# Altium PCB RoverBreakout2.PcbDoc
Units mm, origin at the board's own origin, x right, y up, seen from the top; angles counter-clockwise.
Board outline 78.49 x 33.66 mm, 2 copper layers (Top Layer, Bottom Layer); 29 components, 22 nets, 159 pads, 31 vias.
Unrouted connection lines stored in the file: 1.
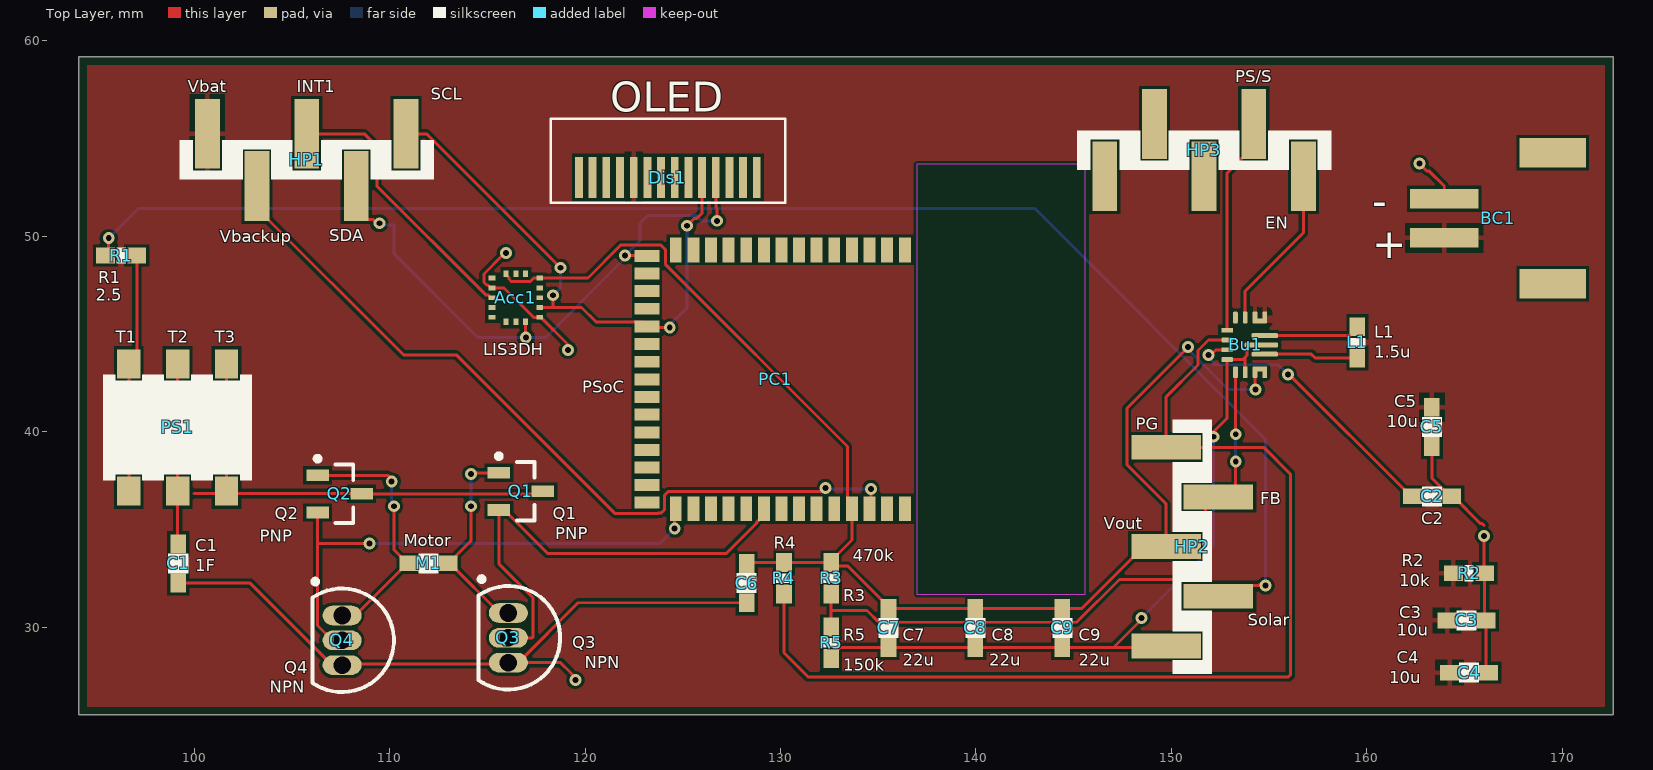
[diagram p0: Top Layer view]
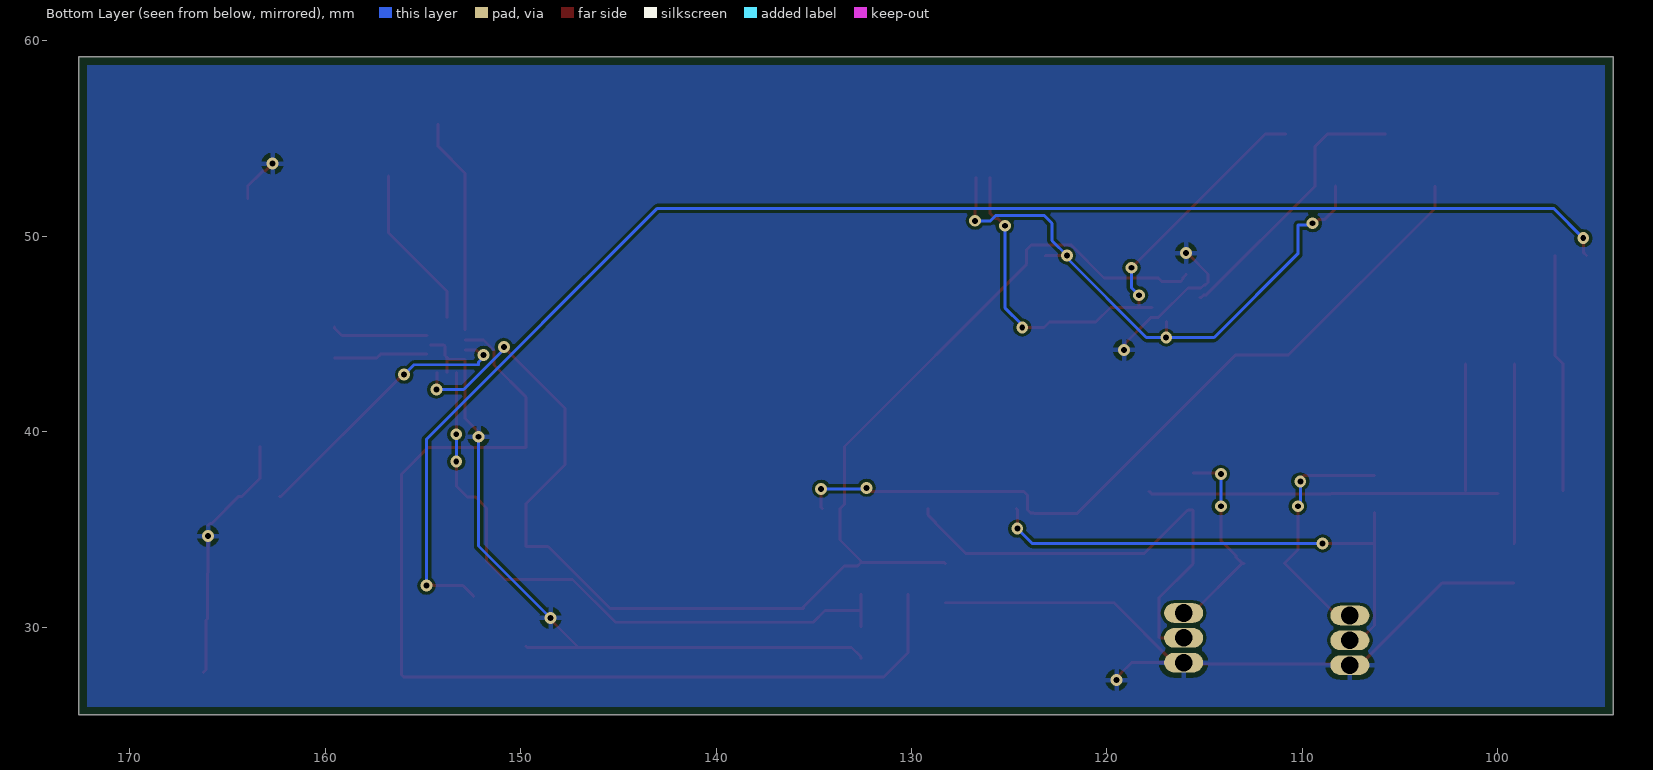
[diagram p1: Bottom Layer view, seen from below]

## Layer stack, top to bottom
Top Solder: solder mask 0.0102, Solder Resist, Dk 3.5
Top Layer: signal copper 0.0356
Dielectric 1: dielectric 0.32, FR-4, Dk 4.8
Bottom Layer: signal copper 0.0356
Bottom Solder: solder mask 0.0102, Solder Resist, Dk 3.5

## Board outline
94.107,25.527 94.107,59.182 172.593,59.182 172.593,25.527

## Design rules (kind name [scope] priority, off if disabled: settings)
BoardOutlineClearance [All] p1: gap=0.406 ignorepadtopadclearanceinfootprint=FALSE except(0: Arc-SplitContinuation Track-SplitContinuation SMDPad-SplitContinuation THPad-SplitContinuation Via-SplitContinuation Fill-SplitContinuation Poly-SplitContinuation Region-SplitContinuation Text-SplitContinuation)
Clearance [All] p1: gap=0.152 ignorepadtopadclearanceinfootprint=FALSE
HoleSize [All] p1: absolutevalues=TRUE maxlimit=6.223 minlimit=0.305 maxpercent=80.000 minpercent=20.000
MinimumSolderMaskSliver [All] p1 off: minsoldermaskwidth=0.254
NetAntennae [All] p1 off: netantennaetolerance=0
PolygonConnect [All] p1: connectstyle=Relief reliefconductorwidth=0.254 reliefentries=4 polygonreliefangle="90 Angle" airgapwidth=0.254
RoutingVias [All] p1: holewidth=0.305 width=0.61 viastyle="Through Hole" minholewidth=0.152 minwidth=0.305 maxholewidth=0.6 maxwidth=1.2
SilkToSilkClearance [All] p1 off: silktosilkclearance=0.254
SilkToSolderMaskClearance [IsPad] p1 off: minsilkscreentomaskgap=0.254 clearancetoexposedcopper=TRUE
SolderMaskExpansion [All] p1: expansion=0.102 istentingtop=FALSE
Width [All] p1: maxlimit=2 minlimit=0.152 preferedwidth=0.152 minimp=50.000000 maximp=50.000000 favimp=50.000000
25 further rules are at their usual default settings.

## Components (designator, comment, footprint, x,y, rotation, side; value= is the part's Value field where it differs from the comment)
Acc1 "LIS3DH" LIS3DH 116.459,46.863 r0 top
BC1 "BatteryConnector" BatteryConnector 163.957,50.927 r90 top
Bu1 "Buck_Boost_Converter" Buck_Boost_Converter 153.924,44.45 r0 top
C1 "Capacitor1" PASSIVE-CAPACITOR-0603 99.187,33.274 r90 top value=1F
C2 "Capacitor1" PASSIVE-CAPACITOR-0603 163.338,36.703 r180 top value=?
C3 "Capacitor1" PASSIVE-CAPACITOR-0603 165.1,30.353 r180 top value=10uF
C4 "Capacitor1" PASSIVE-CAPACITOR-0603 165.227,27.686 r180 top value=10uF
C5 "Capacitor1" PASSIVE-CAPACITOR-0603 163.322,40.259 r90 top value=10uF
C6 "Capacitor1" PASSIVE-CAPACITOR-0603 128.27,32.258 r90 top value=10uF
C7 "Capacitor1" PASSIVE-CAPACITOR-0603 135.525,29.972 r90 top value=22uF
C8 "Capacitor1" PASSIVE-CAPACITOR-0603 139.97,29.972 r90 top value=22uF
C9 "Capacitor1" PASSIVE-CAPACITOR-0603 144.415,29.972 r90 top value=22uF
Dis1 "Display" Display 124.206,53.467 r0 top
HP1 "Header-Pin" Header_Pin 105.791,53.975 r0 top
HP2 "Header-Pin" Header_Pin 151.003,34.163 r90 top
HP3 "Header-Pin" Header_Pin 151.638,54.356 r180 top
L1 "Inductor" PASSIVE-INDUCTOR-0603 159.512,44.577 r270 top value=1.5uH
M1 "Motor" Motor 1373.998,-219.526 r0 top
PC1 "PSoC 63 BLE" "PSoC-63 BLE" 141.288,35.688 r270 top
PS1 "Switch" "3-Way Switch" 98.679,41.656 r0 top
Q1 "PNP" SOT-23B_N 116.713,36.957 r0 top
Q2 "PNP" SOT-23B_N 107.442,36.83 r0 top
Q3 "NPN" TO-226-AA 116.078,29.464 r180 top
Q4 "NPN" TO-226-AA 107.569,29.337 r180 top
R1 "Resistor" PASSIVE-RESISTOR-0603 96.266,49.022 r0 top value=2.5
R2 "Resistor" PASSIVE-RESISTOR-0603 165.227,32.766 r0 top value=10k
R3 "Resistor" PASSIVE-RESISTOR-0603 132.588,32.512 r270 top value=470K
R4 "Resistor" PASSIVE-RESISTOR-0603 130.175,32.512 r270 top value=100k
R5 "Resistor" PASSIVE-RESISTOR-0603 132.588,29.21 r270 top value=150K

## Footprints (in the part's own frame and the unit in brackets; to place one, negate y for a bottom-side part, rotate by r counter-clockwise, add the part's x,y. Pads: shape width x height; smd on the part's side, far side on the other; paste and mask are expansions set on the pad)
"3-Way Switch" [mm]
  rect 1.2x1.5 smd: 1(-2.022,-4.679) 1(-2.022,1.821) 2(0.478,-4.679) 2(0.478,1.821) 3(2.978,-4.679) 3(2.978,1.821)
  silkscreen extent -3.32,-4.13 4.28,1.27, body extent -3.4,-5.23 4.3,2.27, height 3.3
BatteryConnector [mm]
  rect 1x3.5 smd: GND(1,0) VBAT(-1,0)
  rect 1.5x3.4 smd: ""(-3.35,-5.55) ""(3.35,-5.55)
  body extent -3.95,-6 3.95,0, height 5.5
Buck_Boost_Converter [mm] "Buck Boost Converter"
  rrect50% 0.25x0.6 smd: EN(-0.15,1.4) FB(-0.65,-1.4) FB2(-0.15,-1.4) VIN(0.35,1.4) VIN(0.85,1.4) VOUT(0.35,-1.4) VOUT(0.85,-1.4) VSEL(-0.65,1.4)
  rrect50% 0.6x0.25 smd: GND(-1.075,-0.75) PG(-1.075,0.25) VAUX(-1.075,-0.25)
  rrect50% 1.35x0.25 smd: L1(0.85,0.475) L2(0.85,-0.475)
  rrect50% 1.7x0.25 smd: PGND(0.675,0)
  rect 0.6x0.25 smd: PS/S(-1.075,0.75)
  rrect50% 0.75x0.25 smd: VIN(0.6,1.225) VOUT(0.6,-1.225)
  body extent -1.07,-1.43 1.28,1.4, height 0.4
Display [mm]
  rect 0.4x2.1 smd: 1(-4.519,-0.443) 2(-3.819,-0.443) 3(-3.119,-0.443) 4(-2.419,-0.443) 5(-1.719,-0.443) 6(-1.019,-0.443) 7(-0.319,-0.443) 8(0.381,-0.443) 9(1.081,-0.443) 10(1.781,-0.443) 11(2.481,-0.443) 12(3.181,-0.443) 13(3.881,-0.443) 14(4.581,-0.443)
  silkscreen extent -5.97,-1.74 6.03,2.56
Header_Pin [mm]
  rect 1.27x3.56 smd: 1(-5.113,1.274) 2(-2.573,-1.396) 3(-0.033,1.274) 4(2.507,-1.396) 5(5.047,1.274)
  silkscreen extent -6.53,-1.06 6.47,0.94, body extent -6.1,-2.62 6.19,2.26, height 9.78
LIS3DH [mm]
  rect 0.25x0.35 smd: ADC1(0.5,1.225) ADC2(0,1.225) CS(-0.5,-1.225) SDA/SDI/SDO(0.5,-1.225) "SDO / SA0"(0,-1.225) VDD(-0.5,1.225)
  rect 0.35x0.25 smd: ADC3(-1.225,1) GND(-1.225,0.5) GND(1.225,-1) INT1(-1.225,0) INT2(-1.225,-1) NC(1.225,0) NC(1.225,0.5) RES(-1.225,-0.5) "SCL / SPC"(1.225,-0.5) VDDIO(1.225,1)
  body extent -1.5,-1.5 1.5,1.5, height 1
Motor [mm]
  rect 0.965x0.8 smd: 1(-1263,252.8) 2(-1261,252.8)
  silkscreen extent -1262.5,252.3 -1261.5,253.3
PASSIVE-CAPACITOR-0603 [mm]
  rect 0.965x0.8 smd: 1(-1,0) 2(1,0)
  silkscreen extent -0.5,-0.5 0.5,0.5
PASSIVE-INDUCTOR-0603 [mm] "Inductor"
  rect 0.965x0.8 smd: 1(-0.8,0) 2(0.8,0)
  silkscreen extent -0.23,-0.4 0.23,0.4, body extent -0.82,-0.4 0.8,0.4, height 0.4
PASSIVE-RESISTOR-0603 [mm]
  rect 0.965x0.8 smd: 1(-0.8,0) 2(0.8,0)
  silkscreen extent -0.23,-0.4 0.23,0.4, body extent -0.82,-0.4 0.8,0.4, height 0.4
"PSoC-63 BLE" [mm]
  rect 1.27x0.61 smd: 1(-0.38,-4.93) 2(-0.38,-5.83) 3(-0.38,-6.73) 4(-0.38,-7.63) 5(-0.38,-8.54) 6(-0.38,-9.44) 7(-0.38,-10.34) 8(-0.38,-11.24) 9(-0.38,-12.14) 10(-0.38,-13.04) 11(-0.38,-13.95) 12(-0.38,-14.85) 13(-0.38,-15.75) 14(-0.38,-16.65) 30(-13.62,-16.65) 31(-13.62,-15.75) 32(-13.62,-14.85) 33(-13.62,-13.95) 34(-13.62,-13.04) 35(-13.62,-12.14) 36(-13.62,-11.24) 37(-13.62,-10.34) 38(-13.62,-9.44) 39(-13.62,-8.54) 40(-13.62,-7.63) 41(-13.62,-6.73) 42(-13.62,-5.83) 43(-13.62,-4.93)
  rect 0.61x1.27 smd: 15(-0.69,-18.12) 16(-1.59,-18.12) 17(-2.49,-18.12) 18(-3.39,-18.12) 19(-4.29,-18.12) 20(-5.2,-18.12) 21(-6.1,-18.12) 22(-7,-18.12) 23(-7.9,-18.12) 24(-8.8,-18.12) 25(-9.7,-18.12) 26(-10.61,-18.12) 27(-11.51,-18.12) 28(-12.41,-18.12) 29(-13.31,-18.12)
  Top Layer keep-out region: -18,-4.31 4,-4.31 4,4.31 -18,4.31
  body extent -14,-18.5 0,0, height 1.2
SOT-23B_N [mm] "SOT23, 3-Leads, Body 2.9x1.3mm, Pitch 0.95mm, Lead Span 2.4mm, IPC Medium Density"
  rect 1.15x0.6 smd: 1(-1.125,0.95) 2(-1.125,-0.95) 3(1.125,0)
  silkscreen extent -1.25,-1.5 0.7,1.92, body extent -0.7,-1.5 0.7,1.5, height 1.14
TO-226-AA [mm] "TO, Flat Index; 3 In-Line, Axial Leads; Body Dia. 4.8mm; Leads 0.55 x 0.51 mm (max)"
  oval 2x1 hole 0.9: 1(0,-1.27) 2(0,0) 3(0,1.27)
  silkscreen extent -2.65,-3.13 1.52,2.65, body extent -2.65,-2.66 1.52,2.66, height 5.33

## Part data
Q1 Q2: "PNP Bipolar Transistor", LatestRevisionDate=29-May-2009, LatestRevisionNote="IPC-7351 Footprint Added.", PackageDescription="3-Pin SOT-23 Package 0.95 mm Pitch, 2.4 mm Lead Span", PackageReference=SOT-23B, PackageVersion=Aug-1999, Published=8-Jun-2000, Publisher="Altium Limited"
Q3 Q4: "NPN Bipolar Transistor", Code_JEDEC=TO-226-AA, LatestRevisionDate=17-Jul-2002, LatestRevisionNote="Re-released for DXP Platform.", PackageDescription="TO, Flat Index; 3 In-Line, Axial Leads; Body Dia. 4.8mm; Leads 0.55 x 0.51 mm (max)", PackageReference=TO-226-AA, Published=8-Jun-2000, Publisher="Altium Limited"
R1 R2 R3 R4 R5: library part Resistor1

## Via types
v1: diameter 0.61, hole 0.305, Top Layer to Bottom Layer, 31 vias

## Nets (pads, with @x,y where several pads share a name; then routed paths per layer and width w, separated by ;. In a path a pad name is that pad's centre, name@x,y a point inside that pad or via, vN(x,y) a via of type N, cw(c..) or ccw(c..) an arc to the next point about the centre after c; other vN are vias at no path point)
EN: Bu1.EN HP3.1 | length 8.5
  Top Layer w0.152: Bu1.EN 153.774,47.213 156.751,50.19 HP3.1
FB: Bu1.FB HP2.4 R3.2 R5.1 | length 33
  Top Layer w0.152: R5.1 132.588,30.861 ; R3.2 132.588,30.861 ; Bu1.FB 153.274,39.893 v1(153.289,39.878) ; v1(153.289,38.481) 153.289,37.229 152.73,36.67 HP2.4 152.297,36.67 151.738,36.111 151.738,33.4 150.791,32.453 147.339,32.453 145.146,30.261 135.03,30.261 134.43,30.861 132.588,30.861
  Bottom Layer w0.152: v1(153.289,38.481) v1(153.289,39.878)
GND: Acc1.GND BC1.GND Bu1.FB2 Bu1.GND Bu1.PGND C1.1 C2.1 C3.1 C4.1 C5.1 C6.1 C7.1 C8.1 C9.1 HP2.1 Q3.3 Q4.3 R2.2 R5.2 | length 96
  Top Layer w0.152: C1.1 99.203,32.258 102.87,32.258 107.061,28.067 Q4.3 107.632,28.13 116.014,28.13 Q3.3 Q3.3@116.578,28.194 ; v1(115.951,49.149) 115.951,49.111 115.862,49.022 115.77,49.022 114.83,48.083 114.83,47.643 114.964,47.509 115.038,47.509 115.184,47.363 115.234,47.363 115.857,47.363 117.357,45.863 117.684,45.863 117.734,45.863 119.126,44.471 v1(119.126,44.196) ; v1(119.507,27.305) 119.507,27.429 119.253,27.683 119.253,27.686 118.745,28.194 Q3.3@116.578,28.194 ; C6.1 119.642,31.258 Q3.3@116.578,28.194 ; R5.2 132.588,28.492 133.068,28.972 C7.1 C8.1 C9.1 147.033,28.972 ; v1(148.463,30.48) 148.463,30.402 147.033,28.972 ; HP2.1 149.651,28.972 147.033,28.972 ; v1(152.146,39.751) 152.082,39.815 152.082,39.941 152.849,40.708 Bu1.GND 153.662,43.7 153.774,43.812 ; Bu1.FB2 153.774,43.812 ; Bu1.PGND 153.919,44.45 153.87,44.401 153.87,43.908 153.774,43.812 ; v1(162.687,53.721) 163.068,53.34 163.195,53.34 163.957,52.578 BC1.GND ; C5.1 163.322,37.637 164.256,36.703 C2.1 164.42,36.703 165.817,35.306 165.9,35.306 165.989,35.217 ; v1(165.989,34.671) 165.989,32.804 R2.2 166.027,30.426 C3.1 166.1,27.813 C4.1
  Bottom Layer w0.152: v1(148.463,30.48) 152.146,34.163 v1(152.146,39.751)
INT1: Acc1.INT1 HP1.3 | length 14.1
  Top Layer w0.152: HP1.3 108.708,55.249 109.347,54.61 109.347,52.578 114.916,47.009 115.038,47.009 115.184,46.863 Acc1.INT1
NetBu1_L1: Bu1.L1 L1.1 | length 5
  Top Layer w0.152: Bu1.L1 159.142,44.925 159.512,45.295 L1.1
NetBu1_L2: Bu1.L2 L1.2 | length 4.8
  Top Layer w0.152: Bu1.L2 157.157,43.975 157.355,43.777 L1.2
NetBu1_VAUX: Bu1.VAUX C2.2 | length 14.7
  Top Layer w0.152: v1(151.892,43.942) 152.016,43.942 152.274,44.2 Bu1.VAUX ; v1(155.956,42.926) 156.032,42.926 162.255,36.703 C2.2
  Bottom Layer w0.152: v1(151.892,43.942) 151.892,43.818 152.146,43.564 152.146,43.434 155.448,43.434 v1(155.956,42.926)
NetC1_2: C1.2 PS1.2 | length 9.2
  Top Layer w0.152: PS1.2@99.157,43.477 99.157,36.977 99.157,34.304 C1.2
NetM1_1: M1.1 Q2.1 Q4.1 | length 13
  Top Layer w0.152: Q2.1 109.921,37.78 110.109,37.592 v1(110.109,37.465) ; Q4.1 108.249,30.607 110.916,33.274 110.236,33.954 v1(110.236,36.195)
  Bottom Layer w0.152: v1(110.109,37.465) 110.109,36.284 110.198,36.195 v1(110.236,36.195)
NetM1_2: M1.2 Q1.1 Q3.1 | length 10.6
  Top Layer w0.152: M1.2 M1.2@113.081,33.274 ; v1(114.173,36.195) 114.173,34.449 113.404,33.68 113.404,33.598 M1.2@113.081,33.274 ; v1(114.173,37.846) 114.237,37.91 114.363,37.91 114.366,37.907 Q1.1 ; Q3.1 115.621,30.734 M1.2@113.081,33.274
  Bottom Layer w0.152: v1(114.173,36.195) v1(114.173,37.846)
NetPS1_1: PS1.1 R1.2 | length 12.2
  Top Layer w0.152: PS1.1@96.657,36.977 96.657,43.477 97.066,43.886 R1.2
NetPS1_3: PS1.3 Q1.3 Q2.3 | length 24.4
  Top Layer w0.152: 100.006,36.85 108.547,36.85 Q2.3 117.711,36.83 Q1.3 ; PS1.3@101.657,36.977 PS1.3@101.657,43.477
PG: Bu1.PG HP2.5 R4.2 | length 54
  Top Layer w0.152: R4.2 130.175,28.702 131.407,27.47 155.994,27.47 156.083,27.559 156.083,37.846 154.719,39.21 HP2.5 149.729,41.792 151.359,43.421 151.359,44.163 151.896,44.7 Bu1.PG
PS/S: Bu1.PS/S HP3.2 | length 11.1
  Top Layer w0.152: Bu1.PS/S 152.849,53.245 154.211,54.607 HP3.2
SCL: "Acc1.SCL / SPC" Dis1.10 HP1.5 PC1.25 | length 28.7
  Top Layer w0.152: HP1.5 111.893,55.249 v1(118.745,48.396) 118.745,48.514 v1@118.839,48.608 ; 117.684,46.363 118.364,46.363 ; v1(118.364,46.99) 118.364,46.363 ; v1(124.333,45.339) 123.217,45.339 PC1.25 122.939,45.617 120.569,45.617 119.823,46.363 118.364,46.363 ; v1(125.222,50.546) 125.603,50.927 125.73,50.927 125.987,51.184 Dis1.10
  Bottom Layer w0.152: v1(118.364,46.99) 118.745,47.371 v1(118.745,48.396) ; v1(124.333,45.339) 124.333,45.466 125.222,46.355 v1(125.222,50.546)
SDA: Acc1.SDA/SDI/SDO Dis1.11 HP1.4 PC1.29 | length 30.6
  Top Layer w0.152: HP1.4 108.298,51.434 108.857,50.875 109.148,50.875 109.35,50.673 v1(109.474,50.673) ; Acc1.SDA/SDI/SDO 116.959,45.093 116.967,45.085 v1(116.967,44.831) ; v1(122.047,49.022) 123.144,49.022 PC1.29 ; Dis1.11 126.687,51.494 126.746,51.435 v1(126.746,50.8)
  Bottom Layer w0.152: v1(109.474,50.673) 109.561,50.586 110.236,50.586 ; 110.236,50.546 110.236,49.111 114.516,44.831 v1(116.967,44.831) 117.983,44.831 122.047,48.895 v1(122.047,49.022) 122.809,49.784 122.809,50.673 123.215,51.079 125.672,51.079 125.951,50.8 v1(126.746,50.8)
Vb1: PC1.14 Q2.2 Q4.2 | length 27
  Top Layer w0.152: Q2.2 106.317,34.29 ; Q4.2 107.069,29.337 106.317,30.089 106.317,34.29 ; v1(108.966,34.29) 106.317,34.29 ; v1(124.587,35.052) 124.587,36.017 PC1.14
  Bottom Layer w0.152: v1(108.966,34.29) 123.825,34.29 v1(124.587,35.052)
Vb2: PC1.9 Q1.2 Q3.2 | length 24.2
  Top Layer w0.152: Q3.2 117.297,29.464 117.348,29.515 117.348,31.496 115.588,33.256 Q1.2 115.863,36.007 118.088,33.782 127.225,33.782 128.782,35.338 128.782,35.372 129.148,35.738 PC1.9
Vbackup: HP1.2 PC1.3 | length 41.1
  Top Layer w0.152: HP1.2 103.218,51.434 110.71,43.942 113.411,43.942 121.539,35.814 123.698,35.814 123.728,35.844 123.898,35.844 124.068,36.015 124.068,36.761 124.264,36.957 132.08,36.957 132.26,37.137 v1(132.298,37.137) ; PC1.3 134.62,36.13 v1(134.62,37.084)
  Bottom Layer w0.152: v1(132.298,37.137) 132.351,37.084 v1(134.62,37.084)
VBat: BC1.VBAT Bu1.VIN C3.2 C4.2 C5.2 Dis1.5 HP1.1 R2.1
Vout1: Acc1.VDD Acc1.VDDIO Bu1.VOUT C6.2 C7.2 C8.2 C9.2 HP2.3 PC1.4 R3.1 R4.1 | length 71.1
  Top Layer w0.152: Acc1.VDD 115.959,48.038 116.105,47.892 116.105,47.818 116.239,47.684 117.179,47.684 117.357,47.863 Acc1.VDDIO 120.146,47.863 ; 120.146,47.875 121.826,49.555 123.874,49.555 124.104,49.325 124.104,48.578 133.429,39.254 133.429,36.297 PC1.4 133.658,34.465 132.588,33.395 R3.1 ; C6.2 128.324,33.312 R4.1 R3.1 ; v1(150.854,44.337) 147.721,41.203 147.721,38.318 149.729,36.31 HP2.3 148.584,34.13 145.426,30.972 C9.2 C8.2 C7.2 135.525,31.054 133.432,33.147 132.753,33.147 R3.1 ; Bu1.VOUT@154.274,43.05 154.274,42.195 v1(154.305,42.164)
  Bottom Layer w0.152: v1(150.854,44.337) 150.854,44.221 151.13,43.945 151.13,43.942 152.908,42.164 v1(154.305,42.164)
VSolar: HP2.2 R1.1 | length 75.8
  Top Layer w0.152: R1.1 95.631,49.187 v1(95.631,49.911) ; HP2.2 152.958,32.149 154.45,32.149 154.496,32.195 154.749,32.195 v1(154.813,32.131)
  Bottom Layer w0.152: v1(95.631,49.911) 97.155,51.435 143.002,51.435 154.813,39.624 v1(154.813,32.131)
pads on no net: "Acc1.SDO / SA0" Acc1.ADC1 Acc1.ADC2 Acc1.ADC3 Acc1.CS Acc1.INT2 Acc1.NC Acc1.RES BC1. Bu1.VSEL Dis1.1 Dis1.2 Dis1.3 Dis1.4 Dis1.6 Dis1.7 Dis1.8 Dis1.9 Dis1.12 Dis1.13 Dis1.14 HP3.3 HP3.4 HP3.5 PC1.1 PC1.2 PC1.5 PC1.6 PC1.7 PC1.8 PC1.10 PC1.11 PC1.12 PC1.13 PC1.15 PC1.16 PC1.17 PC1.18 PC1.19 PC1.20 PC1.21 PC1.22 PC1.23 PC1.24 PC1.26 PC1.27 PC1.28 PC1.30 PC1.31 PC1.32 PC1.33 PC1.34 PC1.35 PC1.36 PC1.37 PC1.38 PC1.39 PC1.40 PC1.41 PC1.42 PC1.43

## Polygon pours and split planes (outlines as drawn)
VBat on Top Layer "VBAT_L01_P001" (solid, pour order 1): 94.488,59.182 172.212,59.182 172.212,25.527 94.488,25.527
GND on Bottom Layer "GND_L02_P002" (solid, pour order 2): 94.488,59.182 172.212,59.182 172.212,25.527 94.488,25.527

## Silkscreen, mask and mechanical layers (free items; w line width, h text height)
Top Overlay:
  text "PS/S" at 153.264,57.887 h0.61
  text "Vbat" at 99.67,57.379 h0.61
  text "INT1" at 105.258,57.379 h0.61
  text "SCL" at 112.116,56.998 h0.61
  text "OLED" at 121.285,56.388 h1.52
  text "-" at 160.274,51.054 h1.52
  text "EN" at 154.788,50.394 h0.61
  text "SDA" at 106.909,49.759 h0.61
  text "Vbackup" at 101.321,49.708 h0.61
  text "+" at 160.274,48.895 h1.52
  text "R1" at 95.098,47.6 h0.61
  text "2.5" at 94.971,46.711 h0.61
  text "L1" at 160.376,44.806 h0.61
  text "T1" at 95.987,44.552 h0.61
  text "T2" at 98.654,44.552 h0.61
  text "T3" at 101.067,44.552 h0.61
  text "LIS3DH" at 114.783,43.917 h0.61
  text "1.5u" at 160.376,43.79 h0.61
  text "PSoC" at 119.863,42.012 h0.61
  text "C5" at 161.392,41.25 h0.61
  text "10u" at 161.011,40.234 h0.61
  text "PG" at 148.184,40.107 h0.61
  text "FB" at 154.534,36.297 h0.61
  text "Q2" at 104.115,35.535 h0.61
  text "Q1" at 118.339,35.535 h0.61
  text "C2" at 162.789,35.281 h0.61
  text "Vout" at 146.533,35.027 h0.61
  text "PNP" at 118.466,34.519 h0.61
  text "PNP" at 103.353,34.392 h0.61
  text "Motor" at 110.719,34.138 h0.61
  text "R4" at 129.642,34.011 h0.61
  text "C1" at 100.051,33.884 h0.61
  text "470k" at 133.706,33.376 h0.61
  text "R2" at 161.773,33.122 h0.61
  text "1F" at 100.051,32.868 h0.61
  text "10k" at 161.646,32.106 h0.61
  text "R3" at 133.198,31.344 h0.61
  text "C3" at 161.646,30.455 h0.61
  text "Solar" at 153.899,30.074 h0.61
  text "10u" at 161.519,29.566 h0.61
  text "R5" at 133.198,29.312 h0.61
  text "C7" at 136.246,29.312 h0.61
  text "C8" at 140.818,29.312 h0.61
  text "C9" at 145.263,29.312 h0.61
  text "Q3" at 119.355,28.931 h0.61
  text "C4" at 161.519,28.169 h0.61
  text "22u" at 136.246,28.042 h0.61
  text "22u" at 140.691,28.042 h0.61
  text "22u" at 145.263,28.042 h0.61
  text "NPN" at 119.99,27.915 h0.61
  text "150k" at 133.198,27.788 h0.61
  text "Q4" at 104.623,27.661 h0.61
  text "10u" at 161.138,27.153 h0.61
  text "NPN" at 103.861,26.645 h0.61
Board Outline:
  the board outline again, w0.254